# EAGLE board Semana4_Desafio2 (EAGLE 7.6.0)

Size 56.82 x 53.33 mm. Coordinates in mm from the lower left corner, seen from the top.
Outline: 0,0 56.82,0 56.82,53.33 0,53.33 0,0
Copper layers (1*16): Top 0.035mm / dielectric 1.5mm / Bottom 0.035mm
Design rules "default": minimum track width 10mil, minimum drill 24mil, track to track 8mil, track to pad 8mil, pad to pad 8mil, via to via 8mil, smd to smd 8mil, copper to edge 40mil, drill to drill 8mil, minimum pad ring 10mil, minimum via ring 8mil, stop-mask expansion 4mil, vias tented up to drill 0mil, thermal gap 10mil

## Footprints (pad centres in the part's own frame; a part is rotated, then mirrored left to right if it is on the bottom)
DC-POWER = drill 0.889 pad 2.54 octagon: + 0,2.54; - 0,-2.54
RADIAL-D11.36MM = drill 1.27 pad 1.905 square: + -2.54,0 | drill 1.27 pad 1.905: - 2.54,0
LED5MM = drill 0.813 octagon: A -1.27,0; K 1.27,0
0207/10 = drill 0.813 octagon: 1 -5.08,0; 2 5.08,0
TL1105 = drill 1 pad 1.676: 1 -2.25,3.25; 2 2.25,3.25; 3 -2.25,-3.25; 4 2.25,-3.25

## Placement (x,y rotation side)
BAT2  [DC-POWER]  5,22.78 0 top
C1  1000uF  [RADIAL-D11.36MM]  5,73.58 0 top  (outside the outline)
D1  [LED5MM]  5,10.08 0 top
Meter2  [DC-POWER]  5,48.18 0 top
R1  1k‎Ω  [0207/10]  5,60.88 0 top  (outside the outline)
S1  [TL1105]  5,35.48 0 top

## Library data of the parts
BAT2 C1 D1 Meter2 R1 S1 = AUTODESK_CIRCUITS_BREADBOARD

## Nets
N$1: BAT2.- Meter2.- R1.1
N$2: C1.- D1.K R1.2
N$3: BAT2.+ S1.1 S1.3
N$4: C1.+ D1.A Meter2.+ S1.2 S1.4

## Tracks (layer width: path | path; a pad name or v marks a point on that pad's centre or on a via)
N$1  (2 unrouted)
N$2  (2 unrouted)
N$3  (2 unrouted)
N$4  (4 unrouted)